# EAGLE board STOMPBOX_2.0_v5 (EAGLE 9.7.0)
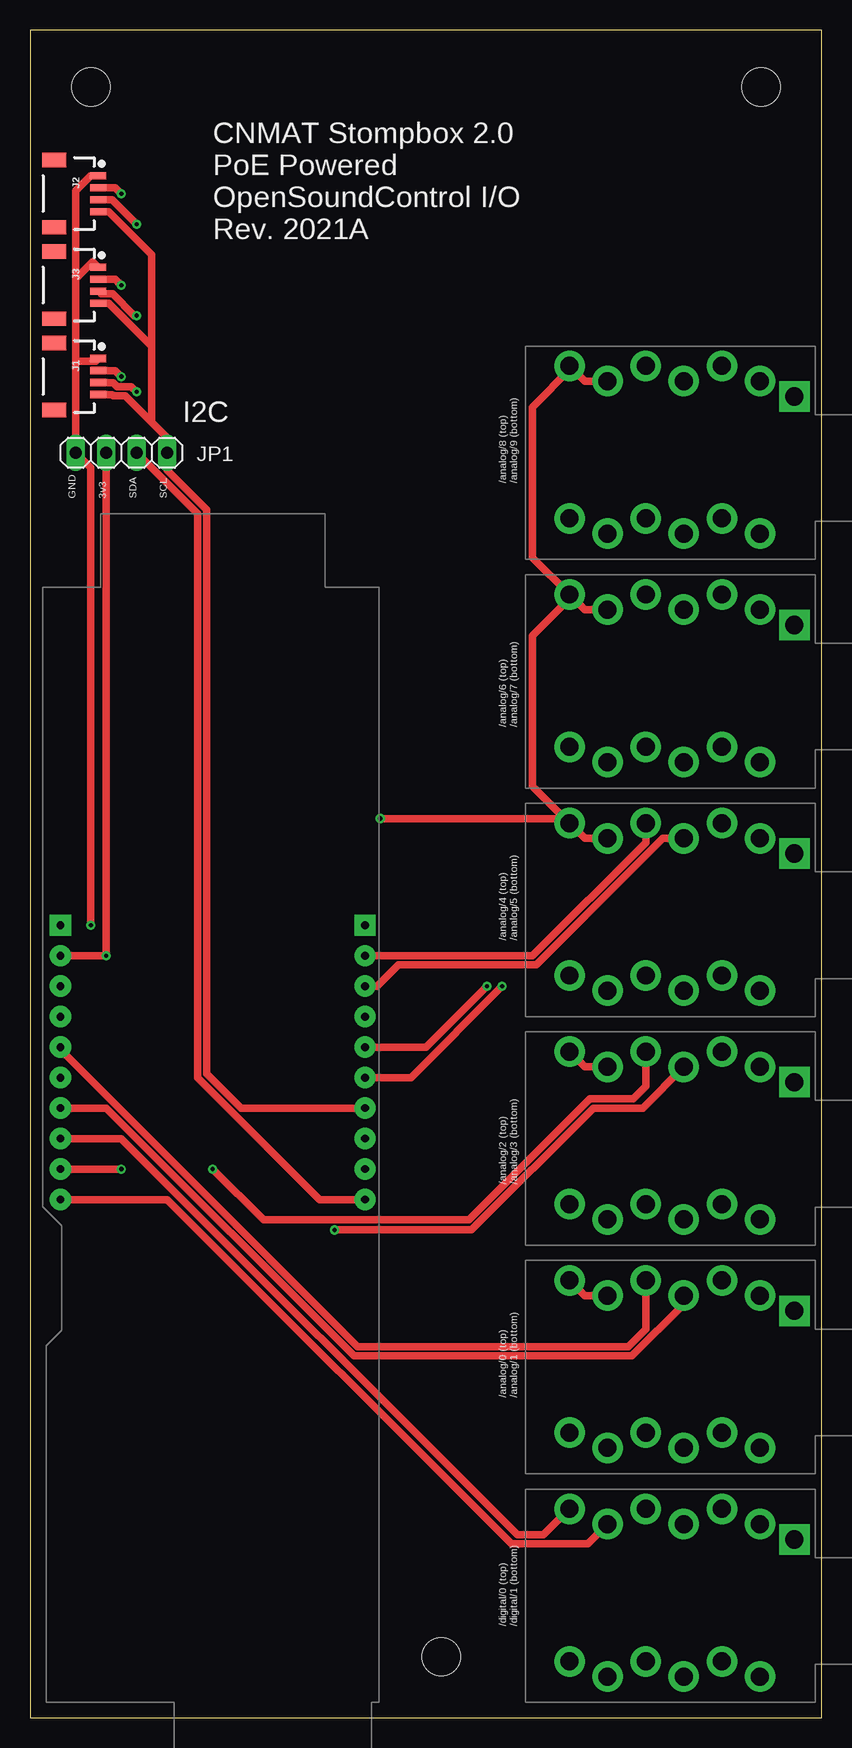
[diagram p0: board, top side]
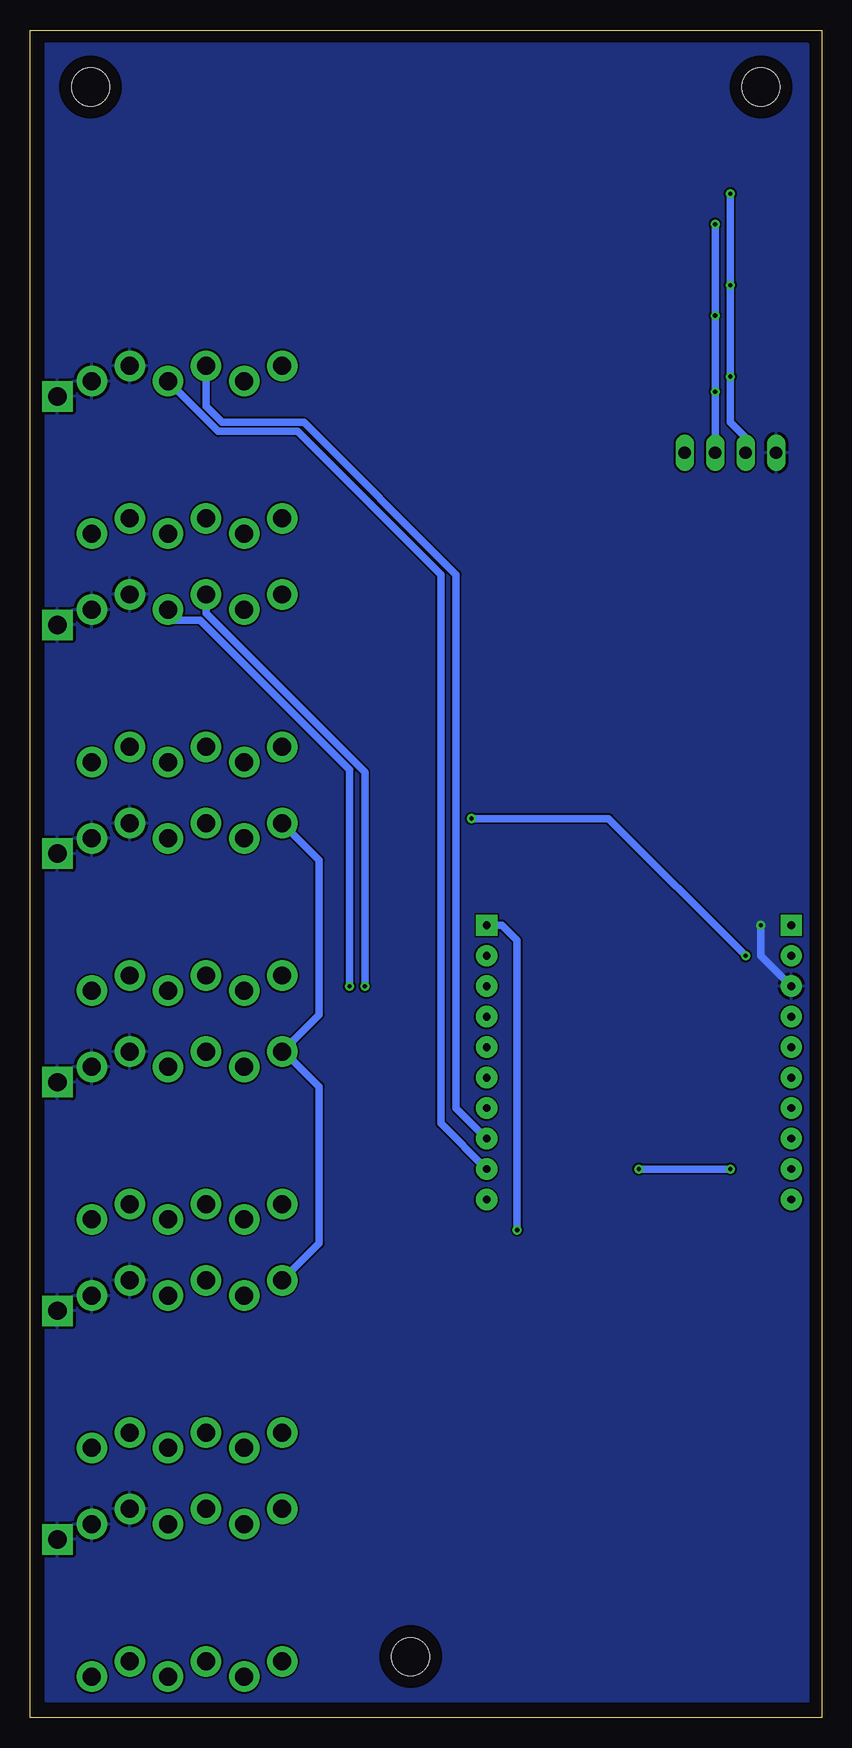
[diagram p1: board, bottom side, seen from below]

Size 66.02 x 140.64 mm. Coordinates in mm from the lower left corner, seen from the top.
Outline: 0,0 66.02,0 66.02,140.64 0,140.64 0,0
Copper layers (1*16): Top 0.035mm / dielectric 1.5mm / Bottom 0.035mm
Design rules "default": minimum track width 6mil, minimum drill 0.35mm, track to track 6mil, track to pad 6mil, pad to pad 6mil, via to via 6mil, smd to smd 6mil, copper to edge 40mil, drill to drill 6mil, minimum pad ring 10mil, minimum via ring 8mil, stop-mask expansion 4mil, vias tented up to drill 0mil, thermal gap 10mil
Holes 3.17 mm at 5.08,135.89 60.96,135.89 34.29,5.08

## Footprints (pad centres in the part's own frame; a part is rotated, then mirrored left to right if it is on the bottom)
1X04_1MM_RA = smd 0.6 x 1.35: 1 -1.5,0; 2 -0.5,0; 3 0.5,0; 4 1.5,0 | smd 1.2 x 2: NC1 2.8,-3.675; NC2 -2.8,-3.675
1X04 = drill 1.016 long: 1 -3.81,0; 2 -1.27,0; 3 1.27,0; 4 3.81,0
NSJ12HC = drill 1.524 pad 2.54 square: GND -1.727,5.969 | drill 1.499 pad 2.54: RB -10.947,7.239; RNB -10.947,-5.461; RNT -14.122,-4.191; RT -14.122,8.509; SB -4.597,7.239; SNB -4.597,-5.461; SNT -7.772,-4.191; ST -7.772,8.509; TB -17.297,7.239; TNB -17.297,-5.461; TNT -20.472,-4.191; TT -20.472,8.509
ESP32-POE-ISO = drill 0.65 pad 1.778: +3V3 -12.7,3.81; ESP_EN -12.7,-1.27; GND -12.7,1.27; GPIO0 -12.7,-3.81; GPIO1 -12.7,-6.35; GPIO2 -12.7,-8.89; GPIO3 -12.7,-11.43; GPIO4 -12.7,-13.97; GPIO5 -12.7,-16.51; GPIO13 12.7,-16.51; GPIO14 12.7,-13.97; GPIO15 12.7,-11.43; GPIO16 12.7,-8.89; GPIO32 12.7,-6.35; GPIO33 12.7,-3.81; GPIO34 12.7,-1.27; GPIO35 12.7,1.27; GPIO36 12.7,3.81 | drill 0.65 pad 1.778 square: +5V -12.7,6.35; GPIO39 12.7,6.35

## Placement (x,y rotation side)
J1  [1X04_1MM_RA]  5.69,111.76 270 top
J2  [1X04_1MM_RA]  5.69,127 270 top
J3  [1X04_1MM_RA]  5.69,119.38 270 top
JP1  PINHD-1X4  [1X04]  7.62,105.41 0 top
U$1  NSJ12HC  [NSJ12HC]  65.46,8.89 0 top
U$2  NSJ12HC  [NSJ12HC]  65.46,27.94 0 top
U$3  NSJ12HC  [NSJ12HC]  65.46,46.99 0 top
U$4  NSJ12HC  [NSJ12HC]  65.46,66.04 0 top
U$5  NSJ12HC  [NSJ12HC]  65.46,85.09 0 top
U$6  NSJ12HC  [NSJ12HC]  65.46,104.14 0 top
U$8  ESP32-POE-ISO  [ESP32-POE-ISO]  15.24,59.69 0 top

## Library data of the parts
J1-J3 = SparkFun-Connectors
JP1 = Connector; CATEGORY: CONNECTOR; SUB-CATEGORY: PIN-HEADER
U$1-U$6 U$8 = ESP32-PoE-ISO

## Nets
+3.3V: J1.2 J2.2 J3.2 JP1.2 U$2.TB U$2.TT U$3.TB U$3.TT U$4.TB U$4.TT U$5.TB U$5.TT U$6.TB U$6.TT U$8.+3V3
GND: J1.1 J2.1 J3.1 JP1.1 U$1.GND U$1.SB U$1.ST U$2.GND U$2.SB U$2.ST U$3.GND U$3.SB U$3.ST U$4.GND U$4.SB U$4.ST U$5.GND U$5.SB U$5.ST U$6.GND U$6.SB U$6.ST U$8.GND
N$1: U$1.TT U$8.GPIO3
N$2: U$1.TB U$8.GPIO5
N$3: U$2.RT U$8.GPIO0
N$4: U$2.RB U$8.GPIO2
N$5: U$3.RT U$8.GPIO4
N$6: U$3.RB U$8.GPIO39
N$7: U$4.RB U$8.GPIO35
N$8: U$4.RT U$8.GPIO36
N$9: U$5.RT U$8.GPIO33
N$10: U$5.RB U$8.GPIO32
N$11: U$6.RT U$8.GPIO15
N$12: U$6.RB U$8.GPIO14
N$15: J1.4 J2.4 J3.4 JP1.4 U$8.GPIO16
N$16: J1.3 J2.3 J3.3 JP1.3 U$8.GPIO13

## Tracks (layer width: path | path; a pad name or v marks a point on that pad's centre or on a via)
+3.3V  (via drill 0.35)
  Top 0.61: v7.62,127 7.12,127.5 J2.2 | J3.2 7.12,119.88 v7.62,119.38 | J1.2 7.12,112.26 v7.62,111.76 | U$8.+3V3 v6.35,63.5 JP1.2 | U$3.TB 46.26,54.23 U$3.TT 44.83,55.5 | U$2.TB 46.26,35.18 U$2.TT | U$4.TT 46.26,73.28 U$4.TB | U$5.TB 46.26,92.33 45.16,93.42 | 45.16,93.42 U$5.TT 41.91,96.68 41.91,109.22 45.16,112.47 | U$6.TB 46.26,111.38 45.16,112.47 | 45.16,112.47 U$6.TT | U$4.TT 41.91,77.63 41.91,90.17 45.16,93.42 | v29.21,74.93 44.61,74.93 U$4.TT
  Bottom 0.61: JP1.2 6.35,106.68 7.62,107.95 v7.62,111.76 v7.62,119.38 v7.62,127 | 44.83,112.65 U$6.TT | 44.83,74.55 U$4.TT 41.91,71.47 41.91,58.58 U$3.TT 44.83,55.5 41.91,52.58 41.91,39.53 U$2.TT | 44.83,93.6 U$5.TT | v6.35,63.5 17.78,74.93 v29.21,74.93
GND  (via drill 0.35)
  Top 0.61: 3.81,113.03 JP1.1 5.08,104.14 v5.08,66.04 | 3.81,113.03 3.81,119.89 | 3.81,119.89 5.24,121.33 J3.1 | J1.1 5.46,113.03 3.81,113.03 | 3.81,119.89 3.81,127.24 5.07,128.5 J2.1
  Bottom 0.61: v5.08,66.04 5.08,63.5 U$8.GND
  pour Bottom: 0.08,1.35 64.69,1.35 64.69,139.62 1.3,139.62 0.08,138.4
N$1
  Top 0.61: U$8.GPIO3 7.62,48.26 40.64,15.24 42.83,15.24 U$1.TT
N$2
  Top 0.61: U$1.TB 46.51,14.48 40.13,14.48 11.43,43.18 U$8.GPIO5
N$3
  Top 0.61: U$8.GPIO0 2.54,55.69 27.32,30.91 49.89,30.91 51.34,32.36 U$2.RT
N$4
  Top 0.61: U$8.GPIO2 6.35,50.8 27,30.15 50.21,30.15 54.51,34.46 U$2.RB
N$5  (via drill 0.35)
  Top 0.61: U$8.GPIO4 v7.62,45.72 | U$3.RT 51.34,52.61 50.29,51.56 46.67,51.56 36.59,41.48 19.48,41.48 v15.24,45.72
  Bottom 0.61: v7.62,45.72 v15.24,45.72
N$6  (via drill 0.35)
  Top 0.61: v25.4,40.64 36.83,40.64 46.99,50.8 51.09,50.8 U$3.RB
  Bottom 0.61: U$8.GPIO39 26.67,66.04 25.4,64.77 v25.4,40.64
N$7
  Top 0.61: U$8.GPIO35 28.96,60.96 30.73,62.74 42.23,62.74 52.77,73.28 U$4.RB
N$8
  Top 0.61: U$4.RT 51.34,72.93 41.91,63.5 U$8.GPIO36
N$9  (via drill 0.35)
  Top 0.61: U$8.GPIO33 33.02,55.88 v38.1,60.96
  Bottom 0.61: v38.1,60.96 38.1,78.8 51.34,92.04 U$5.RT
N$10  (via drill 0.35)
  Top 0.61: U$8.GPIO32 31.75,53.34 v39.37,60.96
  Bottom 0.61: U$5.RB 54.51,91.44 51.82,91.44 39.37,78.99 v39.37,60.96
N$11
  Bottom 0.61: U$8.GPIO15 30.48,50.8 30.48,95.25 43.18,107.95 50.01,107.95 51.34,109.28 U$6.RT
N$12
  Bottom 0.61: U$8.GPIO14 31.75,49.53 31.75,95.25 43.69,107.19 50.32,107.19 U$6.RB
N$15
  Top 0.61: J3.4 6.58,117.88 10.16,114.3 | 10.16,114.3 10.16,107.95 | J2.4 6.58,125.5 10.16,121.92 10.16,114.3 | J1.4 6.86,110.26 6.96,110.16 7.95,110.16 10.16,107.95 | 10.16,107.95 11.43,106.68 JP1.4 11.43,103.95 14.73,100.65 14.73,53.66 17.59,50.8 U$8.GPIO16
N$16  (via drill 0.35)
  Top 0.61: v8.89,124.46 6.85,126.5 J2.3 | J3.3 5.93,118.64 6.9,118.64 8.7,116.84 v8.89,116.84 | J1.3 6.94,111.26 7.27,110.92 8.46,110.92 v8.89,110.49 | JP1.3 13.97,100.33 13.97,53.34 24.13,43.18 U$8.GPIO13
  Bottom 0.61: JP1.3 v8.89,110.49 v8.89,116.84 v8.89,124.46

## Text on the board
tNames: CNMAT Stompbox 2.0 / PoE Powered / OpenSoundControl I/O / Rev. 2021A | I2C | /analog/8 (top) / /analog/9 (bottom) | GND | 3v3 | SDA | SCL | /analog/6 (top) / /analog/7 (bottom) | /analog/4 (top) / /analog/5 (bottom) | /analog/2 (top) / /analog/3 (bottom) | /analog/0 (top) / /analog/1 (bottom) | /digital/0 (top) / /digital/1 (bottom)